# EAGLE board Genie 4 - 3.0 (EAGLE 9.7.0)

Size 235.2 x 179.16 mm. Coordinates in mm from the lower left corner, seen from the top.
Outline: 0,0 235.2,0 235.2,179.16 0,179.16 0,0
Copper layers (1*16): Top 0.035mm / dielectric 1.5mm / Bottom 0.035mm
Design rules "default": minimum track width 6mil, minimum drill 0.35mm, track to track 6mil, track to pad 6mil, pad to pad 6mil, via to via 6mil, smd to smd 6mil, copper to edge 40mil, drill to drill 6mil, minimum pad ring 10mil, minimum via ring 8mil, stop-mask expansion 4mil, vias tented up to drill 0mil, thermal gap 10mil

## Footprints (pad centres in the part's own frame; a part is rotated, then mirrored left to right if it is on the bottom)
LEDRD254W60D565H860B_Y = drill 0.981 pad 1.581: 1 -1.27,0; 2 1.27,0
LEDRD254W60D565H860B_B = drill 0.981 pad 1.581: 1 -1.27,0; 2 1.27,0
LEDRD254W60D565H860B_G = drill 0.981 pad 1.581: 1 -1.27,0; 2 1.27,0
LEDRD254W60D565H860B = drill 0.981 pad 1.581: 1 -1.27,0; 2 1.27,0
PIEZO = drill 1 pad 1.6: 1 -3.5,0; 2 3.5,0
RESAD1016W63L850D250B = drill 0.83 pad 1.43: 1 -5.08,0; 2 5.08,0
SWITCH-MOMENTARY-PTH-6.5MM = drill 1.016 pad 1.88: 1 -3.251,2.261; 2 3.251,2.261; 3 -3.251,-2.261; 4 3.251,-2.261
ARDUINO-UNO-R3-SHIELD = drill 1.016 pad 1.88: 3.3V 24.13,-2.54; 5V 24.13,0; A0 24.13,12.7; A1 24.13,15.24; A2 24.13,17.78; A3 24.13,20.32; A4 24.13,22.86; A5 24.13,25.4; AREF -24.13,-13.97; D2 -24.13,20.32; D3 -24.13,17.78; D4 -24.13,15.24; D5 -24.13,12.7; D6 -24.13,10.16; D7 -24.13,7.62; D8 -24.13,3.81; D9 -24.13,1.27; D10 -24.13,-1.27; D11 -24.13,-3.81; D12 -24.13,-6.35; D13 -24.13,-8.89; GND@0 24.13,2.54; GND@1 24.13,5.08; GND@2 -24.13,-11.43; IOREF 24.13,-7.62; NC 24.13,-10.16; RES 24.13,-5.08; RX -24.13,25.4; SCL -24.13,-19.05; SDA -24.13,-16.51; TX -24.13,22.86; VIN 24.13,7.62

## Placement (x,y rotation side)
DLAMARELO  YELLOW  [LEDRD254W60D565H860B_Y]  200.69,36.91 180 top
DLAZUL  BLUE  [LEDRD254W60D565H860B_B]  164.01,73.88 0 top
DLVERDE  GREEN  [LEDRD254W60D565H860B_G]  200.56,73.82 180 top
DLVERMELHO  RED  [LEDRD254W60D565H860B]  163.77,37.02 0 top
PIEZOMUSIQUINHA  PIEZO  [PIEZO]  182.09,114.82 0 top
RRBAMARELO  1k  [RESAD1016W63L850D250B]  191.8,8.97 90 top
RRBAZUL  1k  [RESAD1016W63L850D250B]  172.9,104.36 90 top
RRBSTART  1k  [RESAD1016W63L850D250B]  226.23,51.4 180 top
RRBVERDE  1k  [RESAD1016W63L850D250B]  191.67,104.3 90 top
RRBVERMELHO  1k  [RESAD1016W63L850D250B]  172.66,9.08 270 top
RRLAMARELO  1k  [RESAD1016W63L850D250B]  85.92,147.55 0 top
RRLAZUL  1k  [RESAD1016W63L850D250B]  86.01,157.43 0 top
RRLVERDE  1k  [RESAD1016W63L850D250B]  85.95,154.3 0 top
RRLVERMELHO_  1k  [RESAD1016W63L850D250B]  85.92,151 0 top
SBAMARELO  SWITCH_MOMENTARY  [SWITCH-MOMENTARY-PTH-6.5MM]  194.34,25.48 90 top
SBAZUL  SWITCH_MOMENTARY  [SWITCH-MOMENTARY-PTH-6.5MM]  170.36,85.31 90 top
SBSTART  SWITCH_MOMENTARY  [SWITCH-MOMENTARY-PTH-6.5MM]  218.61,55.21 90 top
SBVERDE  SWITCH_MOMENTARY  [SWITCH-MOMENTARY-PTH-6.5MM]  194.21,85.25 90 top
SBVERMELHO  SWITCH_MOMENTARY  [SWITCH-MOMENTARY-PTH-6.5MM]  170.12,25.59 90 top
U1  ARDUINO-UNO-R3-SHIELD  [ARDUINO-UNO-R3-SHIELD]  47.88,149.31 270 top

## Library data of the parts
DLAMARELO = Tinkercad; CATEGORY: Opto-Electronic; SUB-CATEGORY: LED; VALUE: LED_YELLOW
DLAZUL = Tinkercad; CATEGORY: Opto-Electronic; SUB-CATEGORY: LED; VALUE: LED_BLUE
DLVERDE = Tinkercad; CATEGORY: Opto-Electronic; SUB-CATEGORY: LED; VALUE: LED_GREEN
DLVERMELHO = Tinkercad; CATEGORY: Opto-Electronic; SUB-CATEGORY: LED; VALUE: LED_RED
PIEZOMUSIQUINHA RRBAMARELO RRBAZUL RRBSTART RRBVERDE RRBVERMELHO RRLAMARELO RRLAZUL RRLVERDE RRLVERMELHO_ SBAMARELO SBAZUL SBSTART SBVERDE SBVERMELHO U1 = Tinkercad

## Nets
DLAMARELO_A: DLAMARELO.1 RRLAMARELO.2
DLAZUL_A: DLAZUL.1 RRLAZUL.2
DLVERDE_A: DLVERDE.1 RRLVERDE.2
DLVERMELHO_A: DLVERMELHO.1 RRLVERMELHO_.2
U1_5V: SBAMARELO.3 SBAMARELO.4 SBAZUL.1 SBAZUL.2 SBSTART.1 SBVERDE.3 SBVERDE.4 SBVERMELHO.1 SBVERMELHO.2 U1.5V
U1_D2: RRLVERDE.1 U1.D2
U1_D3: RRLVERMELHO_.1 U1.D3
U1_D4: RRLAMARELO.1 U1.D4
U1_D6: RRBSTART.2 SBSTART.3 SBSTART.4 U1.D6
U1_D7: PIEZOMUSIQUINHA.1 U1.D7
U1_D8: RRBAZUL.1 SBAZUL.3 SBAZUL.4 U1.D8
U1_D9: RRBVERDE.1 SBVERDE.1 SBVERDE.2 U1.D9
U1_D10: RRBVERMELHO.1 SBVERMELHO.3 SBVERMELHO.4 U1.D10
U1_D11: RRBAMARELO.2 SBAMARELO.1 SBAMARELO.2 U1.D11
U1_GND: DLAMARELO.2 DLAZUL.2 DLVERDE.2 DLVERMELHO.2 PIEZOMUSIQUINHA.2 RRBAMARELO.1 RRBAZUL.2 RRBSTART.1 RRBVERDE.2 RRBVERMELHO.2 U1.GND@0 U1.GND@1 U1.GND@2
U1_TX: RRLAZUL.1 U1.TX

## Tracks (layer width: path | path; a pad name or v marks a point on that pad's centre or on a via)
DLAMARELO_A  (1 unrouted)
DLAZUL_A  (1 unrouted)
DLVERDE_A  (1 unrouted)
DLVERMELHO_A  (1 unrouted)
U1_5V  (9 unrouted)
U1_D2  (1 unrouted)
U1_D3  (1 unrouted)
U1_D4  (1 unrouted)
U1_D6  (3 unrouted)
U1_D7  (1 unrouted)
U1_D8  (3 unrouted)
U1_D9  (3 unrouted)
U1_D10  (3 unrouted)
U1_D11  (3 unrouted)
U1_GND  (12 unrouted)
U1_TX  (1 unrouted)